# EAGLE board nano24rf-topo-panelized (EAGLE 7.6.0)
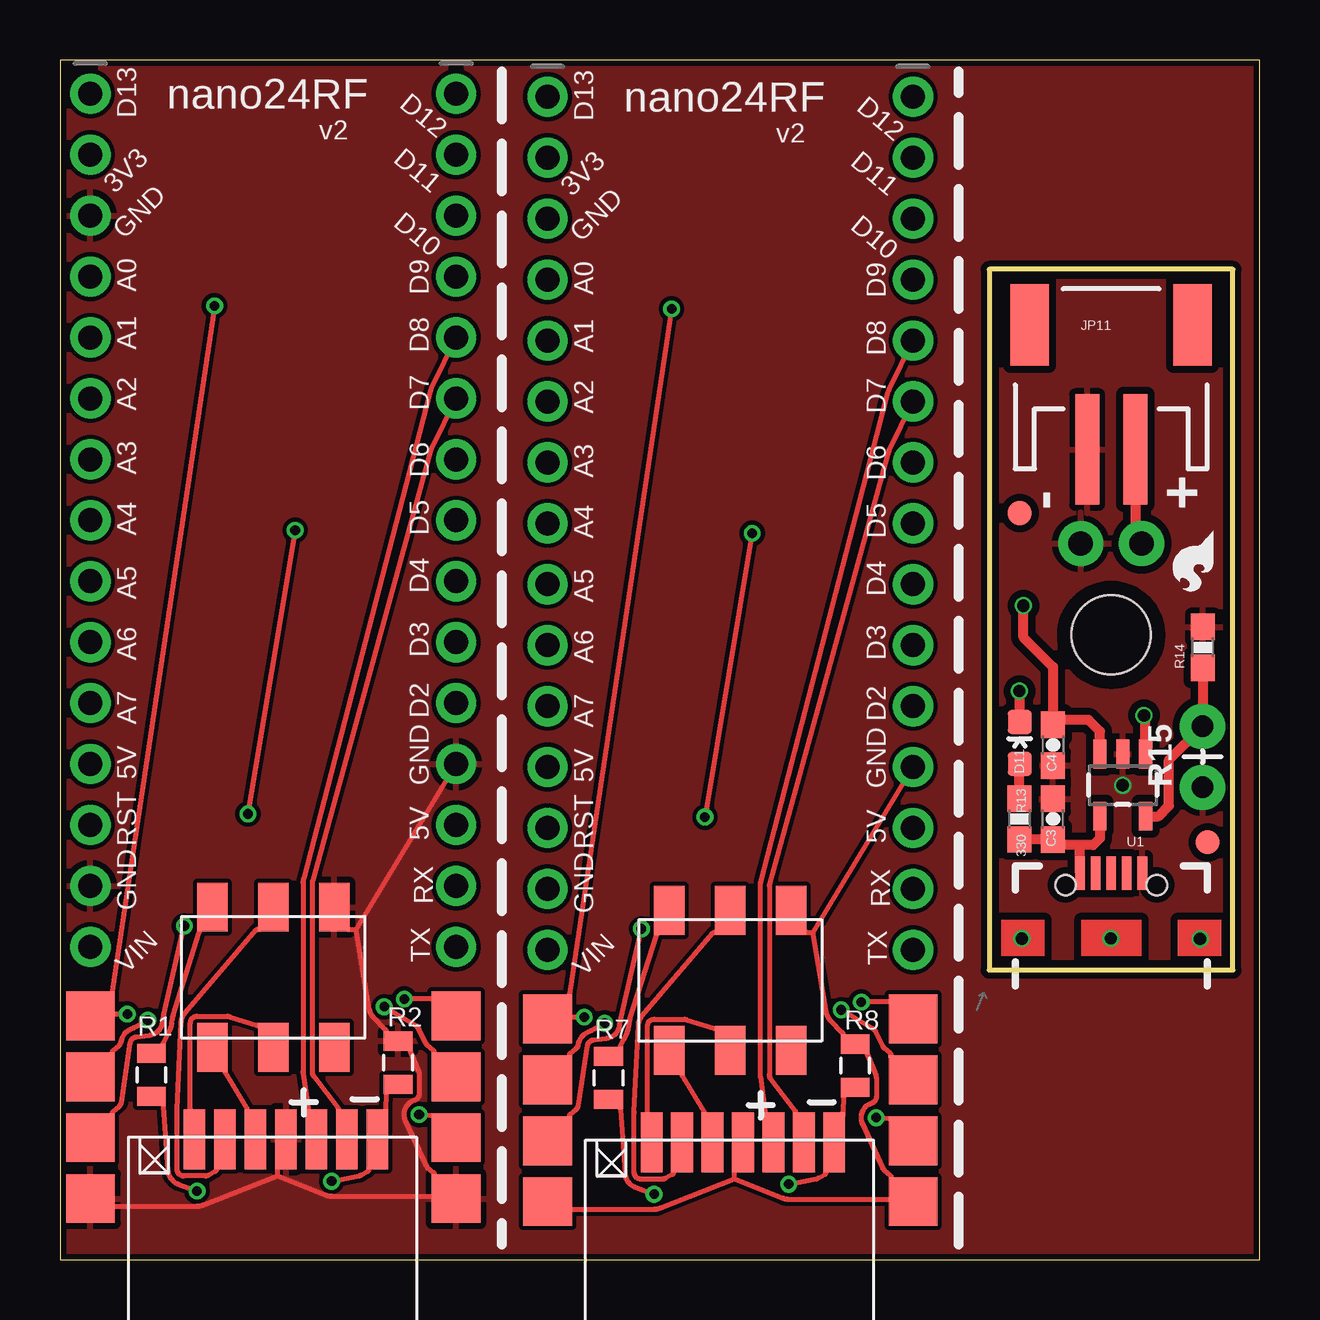
[diagram p0: board, top side]
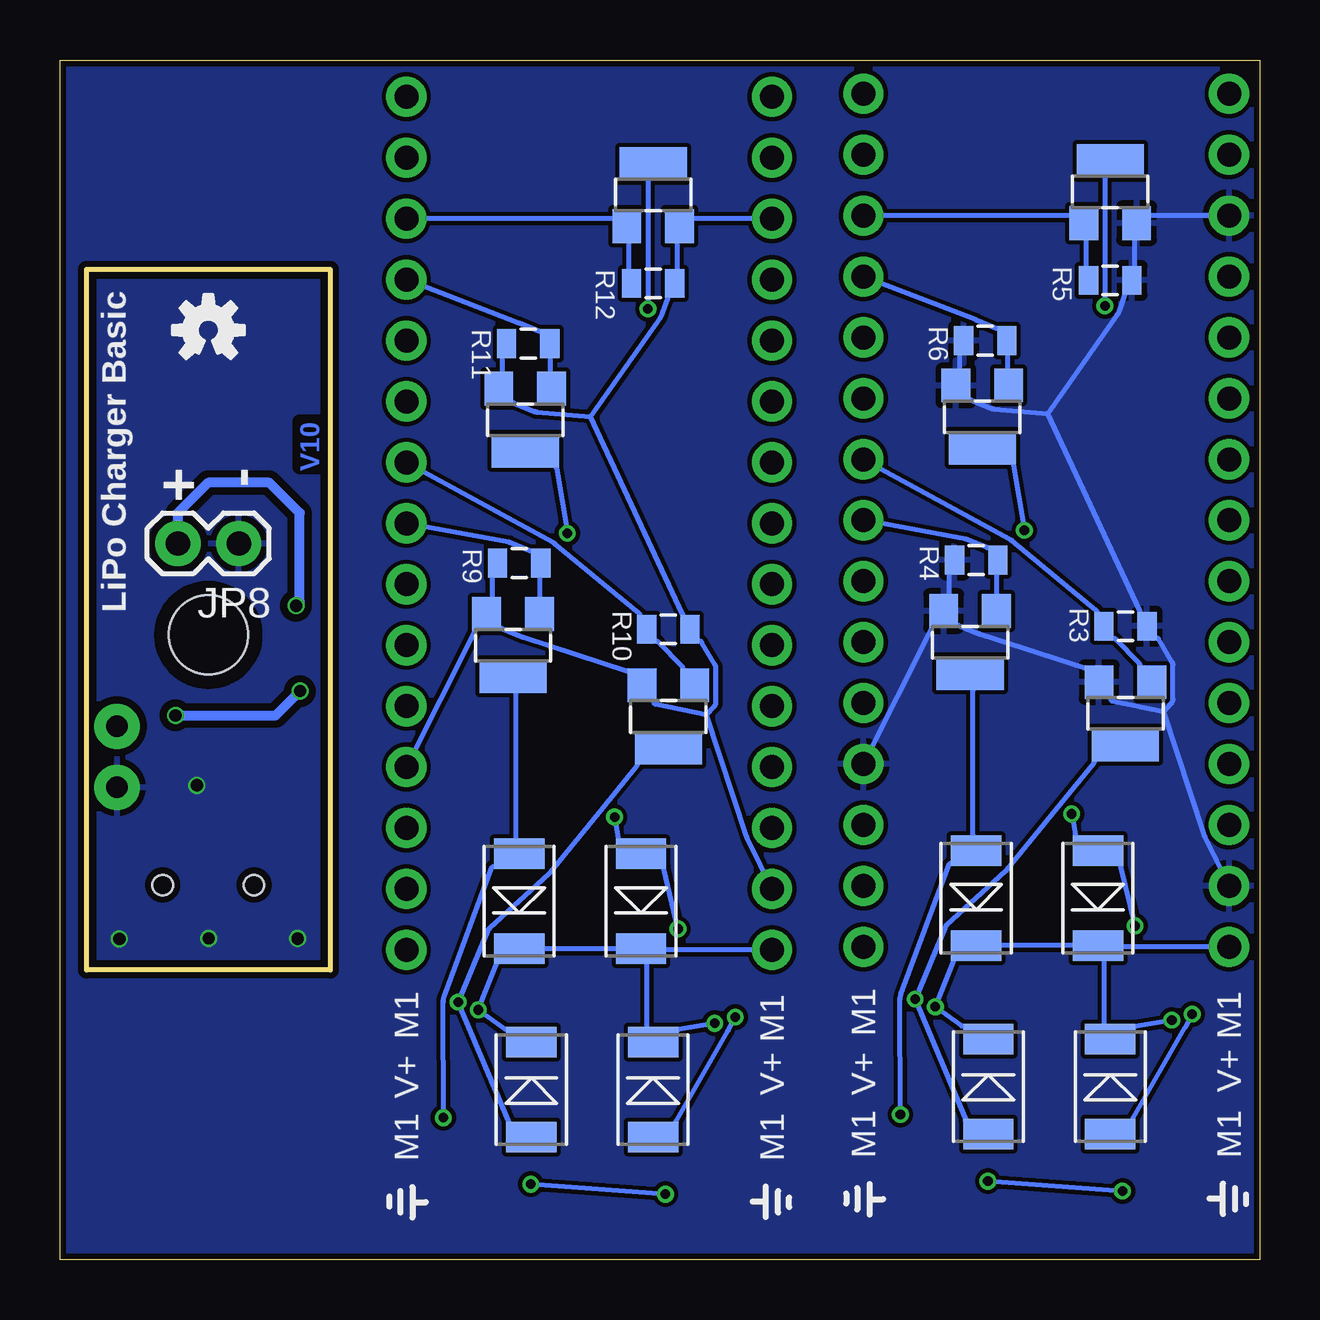
[diagram p1: board, bottom side, seen from below]

Size 50 x 50 mm. Coordinates in mm from the lower left corner, seen from the top.
Outline: 0,0 50,0 50,50 0,50 0,0
Outline: 48.9,41.27 38.73,41.27 38.73,12.06 48.9,12.06 48.9,41.27
Copper layers 1+16: TOP 0.035mm / dielectric 0.15mm / BOTTOM 0.035mm
Design rules "default": minimum track width 8mil, minimum drill 0.6mm, track to track 7mil, track to pad 8mil, pad to pad 8mil, via to via 8mil, smd to smd 8mil, copper to edge 10mil, drill to drill 8mil, minimum pad ring 0.1mm, minimum via ring 0.1mm, stop-mask expansion 4mil, vias tented up to drill 0mil, thermal gap 10mil

## Footprints (pad centres in the part's own frame; a part is rotated, then mirrored left to right if it is on the bottom)
0603-CAP = smd 1.1 x 1: 1 -0.85,0; 2 0.85,0
DO-214AC = smd 1.27 x 2.1: 1 -1.98,0; 2 1.98,0
LED-0603 = smd 1 x 1: A 0,-0.877; C 0,0.877
1X15_ROUND_70 = drill 1 pad 1.676: 1 -17.78,0; 2 -15.24,0; 3 -12.7,0; 4 -10.16,0; 5 -7.62,0; 6 -5.08,0; 7 -2.54,0; 8 0,0; 9 2.54,0; 10 5.08,0; 11 7.62,0; 12 10.16,0; 13 12.7,0; 14 15.24,0; 15 17.78,0
2X03_SMT = smd 1.27 x 2.032: 1 -2.54,-2.921; 2 -2.54,2.921; 3 0,-2.921; 4 0,2.921; 5 2.54,-2.921; 6 2.54,2.921
STAND-OFF = hole 3.302: 0,0
1X02 = drill 1.016 pad 1.88: 1 0,0; 2 2.54,0
USB-AB-MICRO-SMD_V03 = smd 1.4 x 0.4: D+1 2.7,0; D-1 2.7,0.65; GND1 2.7,-1.3; ID1 2.7,-0.65; VBUS1 2.7,1.3 | hole 0.85: 2.2,1.9; 2.2,-1.9
FIDUCIAL-1X2 = smd 1 x 1: 1 0,0
JST-2-SMD = smd 1 x 4.6: 1 -1,-3.7; 2 1,-3.7 | smd 1.6 x 3.4: NC1 -3.4,1.5; NC2 3.4,1.5
SOT23-W = smd 1.2 x 1.4: 1 -1.1,-1.3; 2 1.1,-1.3 | smd 2.8 x 1.4: 3 0,1.3
0805 = smd 0.8 x 1.2: 1 -0.9,0; 2 0.9,0
0603-RES = smd 1.1 x 1: 1 -0.85,0; 2 0.85,0
AXIAL-0.1EZ = drill 0.9 pad 1.88: P$1 0,0; P$2 2.54,0
SOT23-5 = smd 0.55 x 1.2: 1 -0.95,-1.3; 2 0,-1.3; 3 0.95,-1.3; 4 0.95,1.3; 5 -0.95,1.3
SMD1,27-2,54 = smd 0.9 x 2.5: 1 1.63,0.1; 2 2.9,0.1; 3 4.17,0.1; 4 5.44,0.1; 5 6.71,0.1; 6 7.98,0.1; 7 9.25,0.1
FATPAD4 = smd 2.032 x 2.032: P$1 -3.81,0; P$2 -1.27,0; P$3 1.27,0; P$4 3.81,0

## Placement (x,y rotation side)
C3  4.7uF  [0603-CAP]  41.39,18.36 90 top
C4  4.7uF  [0603-CAP]  41.39,21.44 270 top
D1  [DO-214AC]  11.3,7.21 270 bottom
D2  [DO-214AC]  11.81,15.06 90 bottom
D3  [DO-214AC]  6.22,7.21 270 bottom
D4  [DO-214AC]  6.73,15.06 90 bottom
D5  [DO-214AC]  30.35,7.08 270 bottom
D6  [DO-214AC]  30.86,14.94 90 bottom
D7  [DO-214AC]  25.27,7.08 270 bottom
D8  [DO-214AC]  25.78,14.94 90 bottom
D11  RED  [LED-0603]  40.01,21.53 0 top
JP1  [1X15_ROUND_70]  1.27,30.81 270 top
JP2  [1X15_ROUND_70]  16.51,30.81 270 top
JP3  [2X03_SMT]  8.89,11.76 0 top
JP4  [1X15_ROUND_70]  20.32,30.69 270 top
JP5  [1X15_ROUND_70]  35.56,30.69 270 top
JP6  [2X03_SMT]  27.94,11.64 0 top
JP7  STAND-OFF  [STAND-OFF]  43.81,26.04 90 top
JP8  M02PTH  [1X02]  42.55,29.84 180 bottom
JP9  Micro USB  [USB-AB-MICRO-SMD_V03]  43.81,13.41 90 top
JP10  FIDUCIAL1X2  [FIDUCIAL-1X2]  47.84,17.39 90 top
JP11  JST  [JST-2-SMD]  43.81,37.47 0 top
JP12  FIDUCIAL1X2  [FIDUCIAL-1X2]  40.01,31.11 90 top
LOGO1  OSHW-LOGOS  [OSHW-LOGO-S]  43.81,38.73 0 bottom
LOGO2  SFE_LOGO_FLAME.1_INCH  [SFE_LOGO_FLAME_.1]  48.39,30.73 180 top
Q1  [SOT23-W]  5.59,22.77 180 bottom
Q2  [SOT23-W]  12.06,25.73 180 bottom
Q3  [SOT23-W]  6.22,44.5 0 bottom
Q4  [SOT23-W]  11.56,35.13 180 bottom
Q5  [SOT23-W]  24.64,22.64 180 bottom
Q6  [SOT23-W]  31.11,25.61 180 bottom
Q7  [SOT23-W]  25.27,44.37 0 bottom
Q8  [SOT23-W]  30.61,35 180 bottom
R1  [0805]  3.81,7.7 270 top
R2  [0805]  14.1,8.21 270 top
R3  [0805]  5.59,26.4 180 bottom
R4  [0805]  11.81,29.16 0 bottom
R5  [0805]  6.22,40.81 180 bottom
R6  [0805]  11.43,38.31 0 bottom
R7  [0805]  22.86,7.57 270 top
R8  [0805]  33.15,8.08 270 top
R9  [0805]  30.86,29.04 0 bottom
R10  [0805]  24.64,26.27 180 bottom
R11  [0805]  30.48,38.18 0 bottom
R12  [0805]  25.27,40.69 180 bottom
R13  330  [0603-RES]  39.99,18.36 270 top
R14  2.0k  [0603-RES]  47.64,25.52 90 top
R15  [AXIAL-0.1EZ]  47.62,19.68 90 top
U1  MCP73831  [SOT23-5]  44.3,19.78 180 top
U$1  [SMD1,27-2,54]  33.91,4.98 180 top
U$2  FATPAD4  [FATPAD4]  20.32,6.22 270 top
U$3  FATPAD4  [FATPAD4]  35.56,6.22 270 top
U$6  FATPAD4  [FATPAD4]  1.27,6.35 270 top
U$7  [SMD1,27-2,54]  14.86,5.11 180 top
U$8  FATPAD4  [FATPAD4]  16.51,6.35 270 top

## Library data of the parts
C3 C4 = SparkFun-Capacitors; PROD_ID: CAP-08280
D1-D8 = dp_devices
D11 = SparkFun-LED; PROD_ID: DIO-00819
JP1 JP2 JP4 JP5 = microbuilder
JP3 JP6 U$1-U$3 U$6-U$8 = nano24rf
JP7 JP10 JP12 = SparkFun
JP8 = SparkFun-Connectors
JP9 = SparkFun-Connectors; PROD_ID: CONN-11794
JP11 = SparkFun-Connectors; PROD_ID: CONN-08352
LOGO1 LOGO2 = SparkFun-Aesthetics
Q1-Q8 = adafruit
R1-R12 = ATTAMI-V0.00
R13 = SparkFun-Resistors; PROD_ID: RES-00818
R14 = SparkFun-Resistors; PROD_ID: RES-08296
R15 = SparkFun-Resistors
U1 = SparkFun-PowerIC; PROD_ID: IC-09995

## Nets
3V1: JP4.2
3V3: JP1.2
5V: JP3.2 R1.1
5V1: JP6.2 R7.1
CE: JP2.6 U$7.2
CE1: JP5.6 U$1.2
CSN: JP2.5 U$7.3
CSN1: JP5.5 U$1.3
D1: JP5.8 Q6.1 R9.2
D2: JP5.7 Q5.1 R10.2
D3: JP2.10
D4: JP5.10
D5: JP2.8 Q2.1 R4.2
D6: JP2.7 Q1.1 R3.2
D7: JP5.3 Q7.1 R12.2
D8: JP5.4 Q8.1 R11.2
D9: JP2.4 Q4.1 R6.2
D10: JP2.3 Q3.1 R5.2
FET01: D1.2 Q1.3 U$8.P$1
FET02: D2.2 Q2.3 U$8.P$3
FET03: D3.2 Q3.3 U$6.P$1
FET04: D4.2 Q4.3 U$6.P$3
FET05: D5.2 Q5.3 U$3.P$1
FET06: D6.2 Q6.3 U$3.P$3
FET07: D7.2 Q7.3 U$2.P$1
FET08: D8.2 Q8.3 U$2.P$3
GND: JP1.3 JP1.14 JP2.12 JP3.6 Q1.2 Q2.2 Q3.2 Q4.2 R2.1 R3.1 R4.1 R5.1 R6.1 U$6.P$4 U$7.4 U$8.P$4
GND1: JP4.3 JP4.14 JP5.12 JP6.6 Q5.2 Q6.2 Q7.2 Q8.2 R8.1 R9.1 R10.1 R11.1 R12.1 U$1.4 U$2.P$4 U$3.P$4
GND2: C3.2 C4.2 JP8.1 JP9.GND1 JP11.1 R14.2 R15.P$1 U1.2
MISO: JP3.1 U$7.5
MISO1: JP6.1 U$1.5
MOSI: JP3.4 U$7.6
MOSI1: JP6.4 U$1.6
N$1: R7.2 R8.2 U$1.1
N$3: D11.A R13.1
N$6: R1.2 R2.2 U$7.1
PROG: R14.1 R15.P$2 U1.5
RST: JP3.5
RST1: JP6.5
SCK: JP3.3 U$7.7
SCK1: JP6.3 U$1.7
SCL: JP1.9
SCL1: JP4.9
SDA: JP1.8
SDA1: JP4.8
STAT: D11.C U1.1
VCC: C4.1 JP8.2 JP11.2 U1.3
VIN: D1.1 D2.1 D3.1 D4.1 JP1.15 U$6.P$2 U$8.P$2
VIN1: D5.1 D6.1 D7.1 D8.1 JP4.15 U$2.P$2 U$3.P$2
VIN2: C3.1 JP9.VBUS1 R13.2 U1.4

## Tracks (layer width: path | path; a pad name or v marks a point on that pad's centre or on a via)
5V
  TOP 0.203: R1.1 4.31,8.9 4.31,9 arc-27 4.32,9.04 4.56,9.52 arc19 4.66,9.84 4.68,10 arc-10 4.72,10.17 5.81,13.64 arc17 5.82,13.67 5.82,13.77 JP3.2
5V1
  TOP 0.203: R7.1 23.36,8.77 23.36,8.87 arc-27 23.37,8.92 23.61,9.39 arc19 23.71,9.71 23.73,9.87 arc-10 23.77,10.04 24.86,13.51 arc17 24.87,13.54 24.87,13.64 JP6.2
CE
  TOP 0.203: JP2.6 15.51,33.84 arc11 15.43,33.65 10.53,15.77 arc15 10.52,15.7 10.52,7.83 arc37 10.57,7.66 11.59,6.32 arc-37 11.61,6.26 11.61,6.16 U$7.2
CE1
  TOP 0.203: JP5.6 34.56,33.72 arc11 34.48,33.52 29.57,15.65 arc15 29.57,15.57 29.57,7.7 arc37 29.62,7.53 30.64,6.2 arc-37 30.66,6.13 30.66,6.03 U$1.2
CSN
  TOP 0.203: JP2.5 15.51,36.38 arc12 15.43,36.17 10.15,15.87 arc15 10.13,15.7 10.13,7.83 arc8 10.14,7.74 10.34,6.28 arc-8 10.34,6.26 10.34,6.16 U$7.3
CSN1
  TOP 0.203: JP5.5 34.56,36.26 arc12 34.48,36.05 29.2,15.74 arc15 29.18,15.57 29.18,7.7 arc8 29.19,7.61 29.39,6.15 arc-8 29.39,6.13 29.39,6.03 U$1.3
D1
  BOTTOM 0.203: Q6.1 29.99,27.5 29.99,28.54 R9.2 30.26,29.53 30.36,29.53 arc22 30.4,29.54 31.25,29.89 arc-12 31.31,29.91 JP5.8
D2
  BOTTOM 0.203: Q5.1 24.04,24.54 24.04,24.64 arc-44 24.07,24.71 25.07,25.74 arc-46 25.14,25.77 25.24,25.77 R10.2 25.84,26.77 25.84,26.87 arc-50 25.87,26.95 29.38,29.85 arc-11 29.43,29.88 JP5.7
D5
  BOTTOM 0.203: Q2.1 10.94,27.63 10.94,27.73 10.94,28.56 10.94,28.66 R4.2 11.21,29.66 11.31,29.66 arc22 11.35,29.67 12.2,30.02 arc-12 12.26,30.04 JP2.8
D6
  BOTTOM 0.203: Q1.1 4.99,24.66 4.99,24.77 arc-44 5.01,24.84 6.01,25.87 arc-46 6.09,25.9 6.19,25.9 R3.2 6.79,26.9 6.79,27 arc-50 6.82,27.08 10.33,29.98 arc-11 10.38,30.01 JP2.7
D7
  BOTTOM 0.203: R12.2 26.27,41.19 26.27,42.47 Q7.1 26.87,43.39 JP5.3
D8
  BOTTOM 0.203: Q8.1 29.54,36.9 29.54,37.68 R11.2 29.88,38.68 29.98,38.68 arc22 30.02,38.69 30.87,39.04 30.88,39.04 JP5.4
D9
  BOTTOM 0.203: Q4.1 10.49,37.03 10.49,37.13 10.49,37.71 10.49,37.81 R6.2 10.83,38.8 10.93,38.8 arc22 10.97,38.81 11.82,39.16 11.83,39.17 JP2.4
D10
  BOTTOM 0.203: R5.2 7.22,41.31 7.22,41.41 7.22,42.5 7.22,42.6 Q3.1 7.82,43.51 7.92,43.51 JP2.3
FET01  (via drill 0.4 pad 0.7)
  TOP 0.203: U$8.P$1 15.6,10.86 15.49,10.86 v14.35,10.86
  BOTTOM 0.203: D1.2 12.25,5.76 12.25,5.86 arc-23 12.26,5.9 v14.35,10.86 13.12,13.83 arc25 13.05,13.93 10.57,16.2 arc-8 10.54,16.23 8.32,18.97 6.91,20.7 arc-39 6.89,20.77 6.89,20.87 Q1.3
FET02  (via drill 0.4 pad 0.7)
  TOP 0.203: U$8.P$3 15.6,5.99 15.49,5.99 15.49,6 v14.97,6.04
  BOTTOM 0.203: v14.97,6.04 14.98,10.86 arc20 14.94,11.08 12.96,16.45 arc70 12.86,16.51 12.76,16.51 D2.2 11.94,17.58 11.94,17.68 11.94,23.73 11.94,23.84 Q2.3
FET03  (via drill 0.4 pad 0.7)
  TOP 0.203: v2.81,10.23 2.29,10.23 2.18,10.23 U$6.P$1 2.18,11.07 2.18,11.18 arc-8 2.19,11.19 v6.44,39.75
  BOTTOM 0.203: D3.2 5.28,5.76 5.28,5.86 arc30 5.26,5.91 3.11,9.66 arc-1 3.1,9.68 v2.81,10.23 | Q3.3 6.44,45.2 6.44,45.1 v6.44,39.75
FET04  (via drill 0.4 pad 0.7)
  TOP 0.203: v9.8,30.4 v7.83,18.57 | U$6.P$3 2.18,5.99 2.18,6.1 arc-49 2.22,6.17 2.47,6.39 arc40 2.56,6.56 2.94,9.04 arc-74 3.17,9.28 3.74,9.35 arc74 4.28,9.89 4.3,10.05 arc-5 4.33,10.18 v5.19,13.91
  BOTTOM 0.203: v7.83,18.57 7.68,17.7 arc10 7.68,17.68 7.68,17.58 D4.2 5.78,16.51 5.78,16.41 arc-13 5.78,16.39 v5.19,13.91 | Q4.3 10.26,33.23 10.26,33.13 arc-10 10.26,33.11 v9.8,30.4
FET05  (via drill 0.4 pad 0.7)
  TOP 0.203: U$3.P$1 34.65,10.73 v33.4,10.73
  BOTTOM 0.203: D5.2 31.3,5.63 31.3,5.74 arc-23 31.31,5.77 v33.4,10.73 32.17,13.7 arc25 32.1,13.8 29.62,16.08 arc-8 29.59,16.11 27.37,18.84 25.96,20.57 arc-39 25.94,20.64 25.94,20.74 Q5.3
FET06  (via drill 0.4 pad 0.7)
  TOP 0.203: U$3.P$3 34.65,5.87 34.54,5.87 34.53,5.87 v34.02,5.91
  BOTTOM 0.203: v34.02,5.91 34.03,10.73 arc20 33.99,10.95 32.01,16.32 arc70 31.91,16.39 31.81,16.39 D6.2 30.99,17.45 30.99,23.71 Q6.3
FET07  (via drill 0.4 pad 0.7)
  TOP 0.203: v21.86,10.1 21.23,10.1 U$2.P$1 21.23,10.95 21.23,11.05 arc-8 21.23,11.06 v25.49,39.62
  BOTTOM 0.203: D7.2 24.32,5.63 24.32,5.74 arc30 24.31,5.79 22.16,9.54 arc-1 22.15,9.55 v21.86,10.1 | Q7.3 25.49,45.07 v25.49,39.62
FET08  (via drill 0.4 pad 0.7)
  TOP 0.203: v28.85,30.27 v26.88,18.44 | U$2.P$3 21.23,5.87 21.23,5.97 arc-49 21.27,6.04 21.52,6.27 arc40 21.61,6.43 21.98,8.91 arc-74 22.22,9.15 22.79,9.22 arc74 23.33,9.76 23.35,9.93 arc-5 23.38,10.05 v24.24,13.78
  BOTTOM 0.203: v26.88,18.44 26.73,17.57 arc10 26.73,17.55 26.73,17.45 D8.2 24.83,16.39 24.83,16.28 arc-13 24.83,16.26 v24.24,13.78 | Q8.3 29.31,33.11 29.31,33 arc-10 29.31,32.99 v28.85,30.27
GND
  TOP 0.203: JP3.6 11.96,13.77 12.06,13.77 12.34,13.76 | 12.34,13.76 12.89,10.43 arc35 13.07,10.09 13.57,9.58 arc-44 13.6,9.51 13.6,9.4 R2.1 14.6,8.81 14.6,8.71 arc22 14.6,8.67 14.96,7.81 arc-22 14.98,7.71 14.98,6.91 arc-72 14.78,6.64 14.77,6.64 arc97 14.4,5.77 15.24,3.95 arc24 15.31,3.85 15.56,3.63 arc-49 15.6,3.56 15.6,3.45 U$8.P$4 15.6,2.64 11.32,2.64 arc-22 11.09,2.68 9.07,3.48 | JP2.12 12.34,13.76 | U$6.P$4 2.18,2.22 5.71,2.22 arc21 5.94,2.26 9.07,3.48 | 9.07,3.48 9.07,3.86 U$7.4
  BOTTOM 0.203: JP1.3 4.62,43.51 Q3.2 5.22,42.6 5.22,41.31 R5.1 5.62,40.32 5.62,40.22 arc19 5.63,40.18 5.85,39.55 arc16 5.93,39.39 8.83,35.26 | JP1.14 2.27,17.62 arc8 2.33,17.77 3.99,22.83 | R6.1 12.49,37.81 12.49,37.03 Q4.2 12.16,35.83 12.06,35.83 arc22 12.02,35.83 11.16,35.47 arc-17 11.08,35.45 8.83,35.26 | 3.99,22.83 3.68,23.18 arc-42 3.61,23.36 3.61,24.77 arc-30 3.65,24.91 4.2,25.85 arc-60 4.29,25.9 4.39,25.9 R3.1 4.99,26.9 4.99,27 arc-25 5,27.04 8.83,35.26 | JP2.12 13.67,26.29 arc-27 13.66,26.33 13.66,26.43 Q2.2 | R4.1 12.94,28.66 12.94,27.63 Q2.2 | Q2.2 12.67,26.43 12.56,26.43 arc22 12.53,26.43 11.67,26.07 arc-5 11.65,26.07 7.32,24.67 arc-18 7.29,24.66 7.19,24.66 Q1.2 6.19,23.47 6.19,23.36 arc-78 6.11,23.27 3.99,22.83
  pour TOP: 0,50 0,0 50,0 50,50
  pour BOTTOM: 0,50 0,0 50,0 50,50
GND1
  TOP 0.203: JP6.6 31.01,13.64 31.11,13.64 31.39,13.63 | 31.39,13.63 31.95,10.3 arc35 32.12,9.97 32.62,9.45 arc-44 32.65,9.38 32.65,9.28 R8.1 33.65,8.68 33.65,8.58 arc22 33.65,8.54 34.01,7.69 arc-22 34.03,7.58 34.03,6.78 arc-72 33.83,6.51 33.82,6.51 arc97 33.45,5.65 34.29,3.82 arc24 34.36,3.73 34.61,3.5 arc-49 34.65,3.43 34.65,3.33 U$3.P$4 34.65,2.51 30.37,2.51 arc-22 30.14,2.55 28.12,3.35 | JP5.12 31.39,13.63 | U$2.P$4 21.23,2.09 24.76,2.09 arc21 24.99,2.14 28.12,3.35 | 28.12,3.35 28.12,3.74 U$1.4
  BOTTOM 0.203: JP4.3 23.68,43.39 Q7.2 24.27,42.47 24.27,41.19 R12.1 24.67,40.19 24.67,40.09 arc19 24.68,40.05 24.9,39.42 arc16 24.98,39.26 27.88,35.13 | JP4.14 21.32,17.49 arc8 21.38,17.64 23.04,22.7 | R11.1 31.54,37.68 31.54,36.9 Q8.2 31.21,35.71 31.11,35.71 arc22 31.07,35.7 30.21,35.34 arc-17 30.13,35.33 27.88,35.13 | 23.04,22.7 22.73,23.05 arc-42 22.66,23.24 22.66,24.64 arc-30 22.7,24.78 23.25,25.72 arc-60 23.34,25.77 23.44,25.77 R10.1 24.04,26.77 24.04,26.87 arc-25 24.05,26.92 27.88,35.13 | JP5.12 32.72,26.16 arc-27 32.71,26.21 32.71,26.31 Q6.2 | R9.1 31.99,28.54 31.99,27.5 Q6.2 | Q6.2 31.72,26.31 31.61,26.31 arc22 31.58,26.3 30.72,25.95 arc-5 30.7,25.94 26.37,24.54 arc-18 26.34,24.54 26.24,24.54 Q5.2 25.24,23.34 25.24,23.24 arc-78 25.16,23.14 23.04,22.7
GND2  (via drill 0.51)
  other vias: 44.29,19.77 40.09,13.38 43.8,13.39 47.52,13.36
  pour BOTTOM (isolate 0.305): 48.9,12.06 38.73,12.06 38.73,41.27 48.9,41.27
  pour TOP (isolate 0.305): 38.73,12.06 38.73,41.27 48.9,41.27 48.9,12.06
MISO
  TOP 0.203: U$7.5 7.8,6.16 7.8,6.26 arc31 7.79,6.31 6.9,7.77 arc-31 6.88,7.83 6.88,7.93 JP3.1
MISO1
  TOP 0.203: U$1.5 26.85,6.03 26.85,6.13 arc31 26.84,6.19 25.95,7.65 arc-31 25.93,7.7 25.93,7.8 JP6.1
MOSI
  TOP 0.203: U$7.6 6.53,3.86 6.53,3.76 arc-61 6.48,3.67 6.19,3.52 arc-29 6.06,3.48 5.16,3.48 arc-90 4.88,3.76 4.88,6.26 arc-3 4.88,6.27 5.05,9.89 arc-38 5.21,10.29 8.18,13.73 arc-49 8.26,13.77 8.36,13.77 JP3.4
MOSI1
  TOP 0.203: U$1.6 25.58,3.74 25.58,3.63 arc-61 25.53,3.54 25.24,3.39 arc-29 25.11,3.35 24.21,3.35 arc-90 23.93,3.63 23.93,6.13 arc-3 23.93,6.15 24.1,9.76 arc-38 24.26,10.16 27.23,13.61 arc-49 27.3,13.64 27.41,13.64 JP6.4
N$1  (via drill 0.4 pad 0.7)
  TOP 0.203: v30.37,3.14 31.51,3.36 arc18 31.59,3.39 31.88,3.54 arc61 31.93,3.63 31.93,3.74 U$1.1 32.63,6.03 32.63,6.13 32.63,6.14 32.65,6.78 32.65,6.88 R8.2 | R7.2 23.36,6.37 23.36,6.27 23.36,6.26 23.55,3.59 arc66 23.98,3.01 v24.76,2.72
  BOTTOM 0.203: v24.76,2.72 v30.37,3.14
N$3
  TOP 0.406: R13.1 39.99,20.64 D11.A
N$6  (via drill 0.4 pad 0.7)
  TOP 0.203: v11.32,3.27 12.46,3.49 arc18 12.54,3.52 12.83,3.67 arc61 12.88,3.76 12.88,3.86 U$7.1 13.58,6.16 13.58,6.26 13.6,6.9 13.6,6.91 13.6,7.01 R2.2 | R1.2 4.31,6.5 4.31,6.4 4.31,6.39 4.5,3.71 arc66 4.93,3.14 v5.71,2.85
  BOTTOM 0.203: v5.71,2.85 v11.32,3.27
PROG
  TOP 0.406: U1.5 45.78,18.48 46.23,18.92 46.23,20.83 R15.P$2 47.62,24.66 R14.1
SCK
  TOP 0.203: U$7.7 5.43,6.16 5.43,6.26 5.43,9.86 arc-90 5.71,10.14 6.99,10.14 arc-17 7.07,10.12 8.22,9.76 arc17 8.26,9.76 8.36,9.76 JP3.3
SCK1
  TOP 0.203: U$1.7 24.48,6.03 24.48,9.73 arc-90 24.77,10.01 26.04,10.01 arc-17 26.12,10 27.27,9.63 arc17 27.3,9.63 27.41,9.63 JP6.3
STAT  (via drill 0.51)
  TOP 0.305: 40.01,23.68 v39.99,23.69
  TOP 0.406: D11.C 40.01,23.68 | U1.1 45.25,22.62 v45.18,22.68
  BOTTOM 0.406: v45.18,22.68 41.01,22.68 v39.99,23.69
VCC  (via drill 0.51)
  TOP 0.406: v40.16,27.25 40.16,25.93 41.39,24.7 C4.1 41.6,22.5 42.87,22.5 43.35,22.02 U1.3 | JP11.2 44.81,30.11 JP8.2
  BOTTOM 0.406: JP8.2 45.09,31.11 43.81,32.38 41.27,32.38 40.01,31.11 40.01,27.41 v40.16,27.25
VIN  (via drill 0.4 pad 0.7)
  TOP 0.203: U$6.P$2 2.18,8.53 2.18,8.64 arc-48 2.22,8.71 2.47,8.94 arc39 2.56,9.1 2.56,9.1 arc-57 2.94,9.6 3.06,9.65 arc4 3.11,9.68 v3.66,9.98 | U$8.P$2 15.6,8.53 15.6,8.64 arc49 15.56,8.71 15.31,8.93 arc-23 15.24,9.02 14.95,9.63 arc33 14.84,9.75 v13.52,10.53
  BOTTOM 0.203: D4.1 D2.1 12.76,12.55 12.76,12.45 arc22 12.77,12.41 v13.52,10.53 12.41,9.74 arc-36 12.35,9.72 12.25,9.72 D1.1 | JP1.15 5.78,13.03 D4.1 | v3.66,9.98 5.16,9.72 arc10 5.17,9.72 5.28,9.72 D3.1 6.48,9.72 6.48,12.55 D4.1
VIN1  (via drill 0.4 pad 0.7)
  TOP 0.203: U$2.P$2 21.23,8.41 21.23,8.51 arc-48 21.27,8.59 21.52,8.81 arc39 21.61,8.97 21.61,8.98 arc-57 21.99,9.47 22.11,9.53 arc4 22.16,9.55 v22.71,9.85 | U$3.P$2 34.65,8.41 34.65,8.51 arc49 34.61,8.59 34.36,8.81 arc-23 34.29,8.89 34,9.5 arc33 33.89,9.62 v32.57,10.41
  BOTTOM 0.203: D8.1 D6.1 31.81,12.43 31.81,12.32 arc22 31.82,12.29 v32.57,10.41 31.46,9.61 arc-36 31.4,9.59 31.3,9.59 D5.1 | JP4.15 24.83,12.91 D8.1 | v22.71,9.85 24.21,9.6 arc10 24.22,9.59 24.32,9.59 D7.1 25.53,9.59 25.53,12.43 D8.1
VIN2
  TOP 0.406: R13.2 C3.1 41.61,17.28 42.55,17.28 | 42.55,17.28 43.07,17.28 43.35,17.56 U1.4 | JP9.VBUS1 42.52,17.25 42.55,17.28

## Text on the board
BOTTOM: V10
tPlace: D13 | nano24RF | nano24RF | v2 | D12 | D13 | v2 | D12 | D11 | D11 | 3V3 | 3V3 | GND | D10 | GND | D10 | A0 | D9 | A0 | D9 | A1 | D8 | A1 | D8 | A2 | D7 | A2 | D7 | A3 | D6 | A3 | D6 | - | + | A4 | D5 | A4 | D5 | A5 | D4 | D4 | A5 | A6 | D3 | A6 | D3 | D2 | A7 | A7 | D2 | 5V | GND | 5V | GND | RST | 5V | RST | 5V | GND | RX | RX | VIN | GND | VIN | TX | TX
bPlace: LiPo Charger Basic | - | +
bNames: M1 | M1 | M1 | M1 | V+ | V+ | V+ | V+ | M1 | M1 | M1 | M1